# Altium PCB Pixel1.0_4.PcbDoc
Units mm, origin at the board's own origin, x right, y up, seen from the top; angles counter-clockwise.
Board outline 16.23 x 15.6 mm, 2 copper layers (Top, Bottom), stack 0.325 mm thick; 26 components, 11 nets, 59 pads, 6 vias.
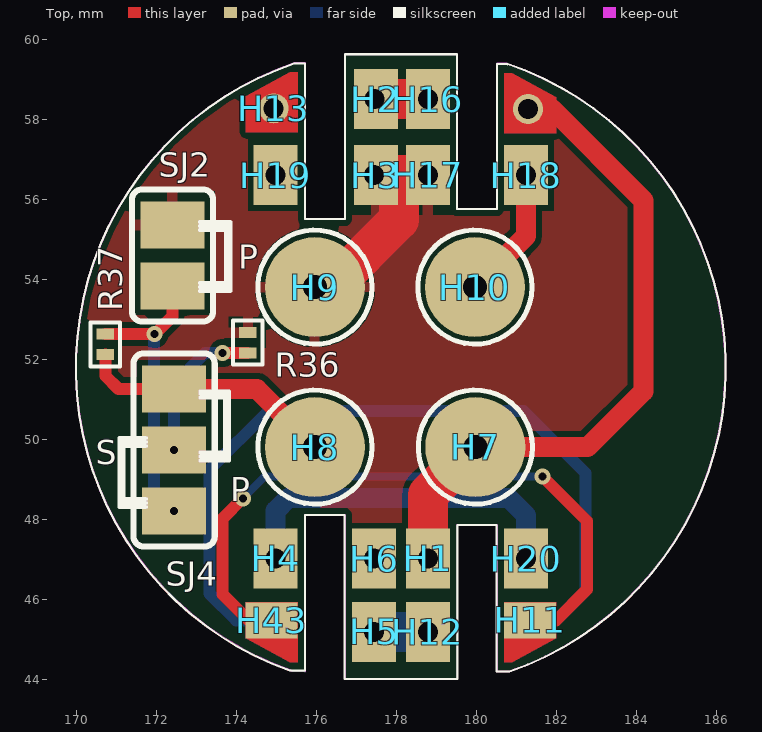
[diagram p0: Top view]
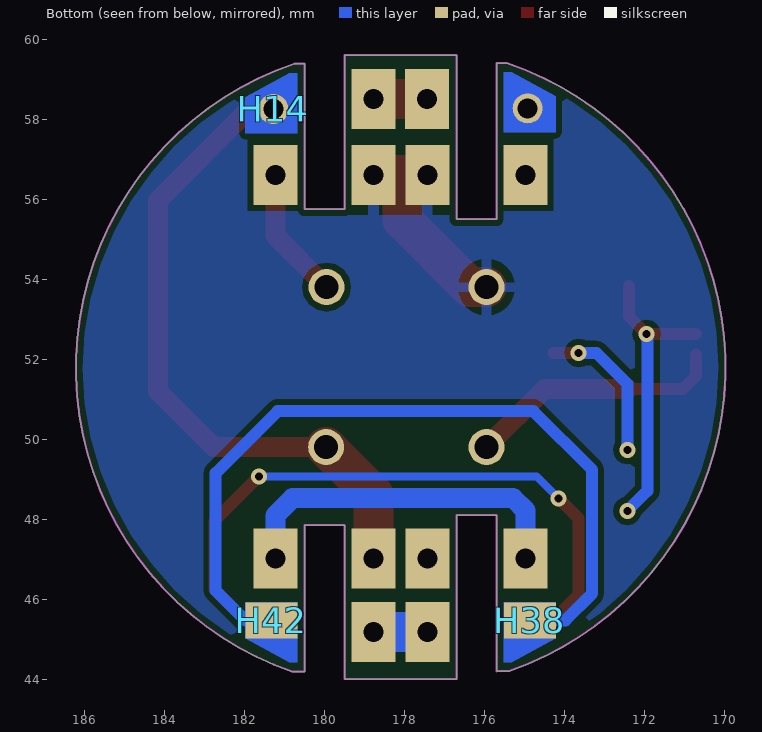
[diagram p1: Bottom view, seen from below]

## Layer stack, top to bottom
Top Solder: solder mask 0.0102, Solder Resist, Dk 3.5
Top: signal copper 0.0356
Dielectric 1: core 0.254, FR-4, Dk 4.2
Bottom: signal copper 0.0356
Bottom Solder: solder mask 0.0102, Solder Resist, Dk 3.5

## Board outline
175.376,44.2 175.7,44.2 175.7,48.1 176.7,48.1 176.7,44 179.5,44 179.5,47.85 180.5,47.85 180.5,44.186 180.814,44.186 180.807,44.186 ccw(c178.184,51.776) 180.756,59.383 180.751,59.386 180.5,59.386 180.5,55.75 179.5,55.75 179.5,59.6 176.7,59.6 176.7,55.5 175.7,55.5 175.7,59.4 175.439,59.4 175.434,59.397 ccw(c178.006,51.79)

## Design rules (kind name [scope] priority, off if disabled: settings)
Clearance [All] p1: gap=0.15
ComponentClearance [All] p1 off: gap=0.2 collisioncheckmode=3 verticalgap=0.2 showdistances=FALSE
HoleSize [All] p1: absolutevalues=TRUE maxlimit=5 minlimit=0.025 maxpercent=80.000 minpercent=20.000
HoleToHoleClearance mdViaViaSameLayer [All] p1: gap=0.203 allowstackedmicrovias=TRUE
HoleToHoleClearance [All] p2: gap=0.254 allowstackedmicrovias=TRUE
MinimumSolderMaskSliver [All] p1 off: minsoldermaskwidth=0.254
PolygonConnect ThermalVias [IsVia] p1: connectstyle=Direct reliefconductorwidth=0.254 reliefentries=4 polygonreliefangle="90 Angle" airgapwidth=0.254
PolygonConnect [All] p2: connectstyle=Relief reliefconductorwidth=0.254 reliefentries=4 polygonreliefangle="90 Angle" airgapwidth=0.254
RoutingVias [All] p1: holewidth=0.2 width=0.4 viastyle="Through Hole" minholewidth=0.2 minwidth=0.4 maxholewidth=3 maxwidth=5
ShortCircuit [All] p1 off: allowed=FALSE
SilkToBoardRegionClearance [All] p1 off:
SilkToSilkClearance [All] p1 off: silktosilkclearance=0.254
SilkToSolderMaskClearance [IsPad] p1 off: minsilkscreentomaskgap=0.254 clearancetoexposedcopper=TRUE
SolderMaskExpansion via [isvia] p1: expansion=0 soldermaskfromhole=TRUE
SolderMaskExpansion [All] p2: expansion=0.05
Width Width_2 [InNet('BAT+')] p1: maxlimit=3 minlimit=0.1 preferedwidth=0.3
Width Width_1 [InNet('GND')] p2: maxlimit=3 minlimit=0.1 preferedwidth=0.3
Width [All] p3: maxlimit=3 minlimit=0.1 preferedwidth=0.5
22 further rules are at their usual default settings.

## Components (designator, comment, footprint, x,y, rotation, side; value= is the part's Value field where it differs from the comment)
H1 "MOUNT-PAD-ROUNDTMOUNT2" TMOUNT2#1 178.774,47.01 r0 top
H2 "MOUNT-PAD-ROUNDTMOUNT2" TMOUNT2#2 177.44,58.5 r0 top
H3 "MOUNT-PAD-ROUNDTMOUNT2" TMOUNT2#3 177.43,56.6 r0 top
H4 "MOUNT-PAD-ROUNDTMOUNT2" TMOUNT2#1 174.97,47.01 r0 top
H5 "MOUNT-PAD-ROUNDTMOUNT2" TMOUNT2#1 177.43,45.18 r0 top
H6 "MOUNT-PAD-ROUNDTMOUNT2" TMOUNT2#1 177.43,47.01 r0 top
H7 "MOUNT-PAD-ROUND2.8" 2,0-PAD 179.96,49.8 r0 top
H8 "MOUNT-PAD-ROUND2.8" 2,0-PAD 175.95,49.8 r0 top
H9 "MOUNT-PAD-ROUND2.8" 2,0-PAD 175.95,53.8 r0 top
H10 "MOUNT-PAD-ROUND2.8" 2,0-PAD 179.95,53.8 r0 top
H11 "MOUNT-PAD-ROUNDTRAPEZOID" TMOUNT5 181.381,45.17 r0 top
H12 "MOUNT-PAD-ROUNDTMOUNT2" TMOUNT2#1 178.774,45.18 r0 top
H13 "MOUNT-PAD-ROUNDTMOUNT3" TMOUNT3 174.82,58.42 r180 top
H14 "MOUNT-PAD-ROUNDTMOUNT3" TMOUNT3 181.38,58.4 r0 bottom
H16 "MOUNT-PAD-ROUNDTMOUNT2" TMOUNT2#1 178.774,58.5 r0 top
H17 "MOUNT-PAD-ROUNDTMOUNT2" TMOUNT2#1 178.774,56.6 r0 top
H18 "MOUNT-PAD-ROUNDTMOUNT2" TMOUNT2#1 181.23,56.6 r0 top
H19 "MOUNT-PAD-ROUNDTMOUNT2" TMOUNT2#1 174.97,56.6 r0 top
H20 "MOUNT-PAD-ROUNDTMOUNT2" TMOUNT2#1 181.23,47.01 r0 top
H38 "MOUNT-PAD-ROUNDTRAPEZOID" TMOUNT5 174.816,45.17 r180 bottom
H42 "MOUNT-PAD-ROUNDMIRROR" TMOUNTTRAPMIRROR 181.28,45.17 r180 bottom
H43 "MOUNT-PAD-ROUNDMIRROR" TMOUNTTRAPMIRROR 174.92,45.17 r0 top
R36 "DNP" R0201 174.27,52.41 r270 top
R37 "DNP" R0201 170.71,52.37 r270 top
SJ2 "SJ" SJ 172.39,54.591 r270 top
SJ4 "SJ2W" SJ_2 172.431,49.729 r270 top

## Footprints (in the part's own frame and the unit in brackets; to place one, negate y for a bottom-side part, rotate by r counter-clockwise, add the part's x,y. Pads: shape width x height; smd on the part's side, far side on the other; paste and mask are expansions set on the pad)
2,0-PAD [mm] "2,0-PAD"
  rrect100% 2.5x2.5 smd: 1(0,0)
  round 0.9 hole 0.6: 1(0,0)
  silkscreen extent -1.42,-1.43 1.43,1.43
R0201 [mm] "R0201"
  rect 0.28x0.43 smd: 1(-0.255,0) 2(0.255,0)
  silkscreen extent -0.55,-0.37 0.55,0.37, body extent -0.32,-0.16 0.33,0.16, height 0.24
SJ [mil] "SJ"
  rect 46x63 smd: 1(-30,0) 2(30,0)
  silkscreen extent -65,-40 65,40
SJ_2 [mil] "SJ_2"
  rect 46x63 smd: 1(-60,0) 2(0,0) 3(60,0)
  silkscreen extent -95,-40 95,40
TMOUNT2#1 [mm] "TMOUNT2"
  rect 1.1x1.5 smd far side: 1(0,0)
  rect 1.1x1.5 smd: 1(0,0)
  round 0.75 hole 0.5: 1(0,0)
TMOUNT2#2 [mm] "TMOUNT2"
  rect 1.1x1.5 smd far side: 1(0,0)
  round 0.75 hole 0.5: 1(0,0)
  rect 1.1x1.5 smd: 1(0.04,0)
TMOUNT2#3 [mm] "TMOUNT2"
  rect 1.1x1.5 smd far side: 1(0,0)
  round 0.75 hole 0.5: 1(0,0)
  rect 1.1x1.5 smd: 1(0.05,0)
TMOUNT3 [mm] "TMOUNT3"
  round 0.75 hole 0.5: 1(-0.1,0.15)
  Top region: -0.7,0.75 -0.7,-0.75 -0.5,-0.75 0.6,-0.15 0.6,0.75
  Bottom region: -0.7,0.75 -0.7,-0.75 -0.5,-0.75 0.6,-0.15 0.6,0.75
TMOUNT5 [mm] "TMOUNT5"
  rect 1.3x0.9 smd: 1(-0.05,0.3)
  Top region: -0.7,0.75 -0.7,-0.75 -0.5,-0.75 0.6,-0.15 0.6,0.75
TMOUNTTRAPMIRROR [mm] "TMOUNTTRAPMIRROR"
  rect 1.3x0.9 smd: 1(-0.05,0.3)
  Top region: -0.7,0.75 -0.7,-0.15 0.4,-0.75 0.6,-0.75 0.6,0.75

## Part data
H1 H2 H3 H4 H5 H6 H7 H8 H9 H10 H11 H12 H13 H14 H16 H17 H18 H19 H20 H38 H42 H43: "MOUNTING PAD, round"
R36 R37: library part R-US_R0201, "RESISTOR, American symbol"
SJ2 SJ4: "SMD solder JUMPER"

## Via types
v1: diameter 0.4, hole 0.2, Top to Bottom, 6 vias

## Nets (pads, with @x,y where several pads share a name; then routed paths per layer and width w, separated by ;. In a path a pad name is that pad's centre, name@x,y a point inside that pad or via, vN(x,y) a via of type N, cw(c..) or ccw(c..) an arc to the next point about the centre after c; other vN are vias at no path point)
ATOMIZER+: H1.1 H7.1 H14.1 | length 16.7
  Top w0.5: H7.1@179.96,49.8 182.77,49.8 184.16,51.19 184.16,55.97 181.88,58.25 H14.1
  Top w1: H1.1@178.774,47.01 178.774,48.614 H7.1@179.96,49.8
BAT+: H2.1 H16.1 | length 1.3
  Top w1: H2.1@177.48,58.5 H16.1@178.774,58.5
CARTRIDGE_SENSE/SDA: H8.1 R37.2 SJ4.1 | length 6.5
  Top w0.3: R37.2 170.71,51.583 171.04,51.253 SJ4.1
  Top w0.5: SJ4.1 174.497,51.253 H8.1@175.95,49.8
GND: H3.1 H9.1 H17.1 R36.1 SJ2.1 | length 5.2
  Top w1: H9.1@175.95,53.8 176.37,53.8 178.05,55.48 178.05,56.6 ; H3.1@177.48,56.6 178.05,56.6 ; H17.1@178.774,56.6 178.05,56.6
NetR36_2: R36.2 SJ4.2 | length 3.8
  Top w0.3: v1(173.645,52.155) R36.2
  Bottom w0.3: v1(172.431,49.729) 172.431,51.38 173.206,52.155 v1(173.645,52.155)
NetR37_1: R37.1 SJ2.2 SJ4.3 | length 7.3
  Top w0.3: R37.1 v1(171.945,52.625) 172.39,53.07 SJ2.2
  Bottom w0.3: v1(171.945,52.625) 171.931,52.611 171.931,48.705 v1(172.431,48.205)
P2_2/DC/!CHARGE: H4.1 H20.1 | length 8.9
  Bottom w0.5: H4.1@174.97,47.01 174.97,48.21 175.285,48.525 180.795,48.525 181.23,48.09 H20.1@181.23,47.01
RXD: H11.1 H43.1 | length 17
  Top w0.3: v1(174.15,48.52) 173.645,48.015 173.645,46.115 174.29,45.47 H43.1 ; H11.1 181.98,45.47 182.75,46.24 182.75,47.958 v1(181.638,49.07)
  Top w0.5: H43.1 H43.1@174.87,45.64
  Bottom w0.2: v1(174.15,48.52) 174.7,49.07 v1(181.638,49.07)
SCL: H10.1 H18.1 | length 3.3
  Top w0.5: H10.1@179.95,53.8 181.23,55.08 H18.1@181.23,56.6
TXD: H38.1 H42.1 | length 20.2
  Bottom w0.3: H38.1@174.87,45.47 173.98,45.47 173.31,46.14 173.31,49.23 174.78,50.7 181.17,50.7 182.72,49.15 182.72,46.21 181.98,45.47 H42.1
VDD: H5.1 H12.1 | length 1.3
  Bottom w1: H5.1@177.43,45.18 H12.1@178.774,45.18
pads on no net: H6.1 H13.1 H19.1

## Polygon pours and split planes (outlines as drawn)
GND on Bottom "BOTTOM_GND" (solid, remove dead copper, pour order 0): 169.73,59.8 186.56,59.8 186.59,59.83 186.62,59.8 186.62,43.68 169.8,43.68 169.73,43.75 169.73,59.83
GND on Top "TOP_GND" (solid, remove dead copper, pour order 2): 169.8,60.05 169.84,60.09 186.33,60.09 186.33,43.43 169.77,43.43 169.77,60.01 169.73,60.05

## Keep-outs
Keep-Out Layer:
  lines w0.051: 175.376,44.2 175.7,44.2 ; 175.383,44.2 cw(c178.006,51.79) 175.434,59.397 ; 175.439,59.4 175.7,59.4 175.7,55.5 176.7,55.5 176.7,59.6 179.5,59.6 179.5,55.75 180.5,55.75 180.5,59.38 ; 175.7,44.196 175.7,48.1 176.7,48.1 176.7,44 179.5,44 179.5,47.85 180.5,47.85 180.5,44.186 180.814,44.186 ; 180.5,59.386 180.751,59.386 ; 180.756,59.383 cw(c178.184,51.776) 180.807,44.186

## Silkscreen, mask and mechanical layers (free items; w line width, h text height)
Top Overlay:
  lines w0.051: 175.32,44.21 175.7,44.21 175.7,48.098 176.69,48.098 176.69,44 179.51,44 179.51,47.85 180.49,47.85 180.49,44.186 ; 175.32,44.211 cw(c178.002,51.78) 175.43,59.387 ; 175.434,59.39 175.7,59.39 175.7,55.5 176.7,55.5 176.7,59.626 179.5,59.626 179.5,55.75 180.5,55.75 180.5,59.38 180.75,59.38 180.76,59.37 ; 180.496,44.186 180.812,44.186 ; 180.76,59.383 cw(c178.191,51.775) 180.817,44.187
  lines w0.102: 171.72,48.299 171.16,48.299 ; 171.72,48.399 171.16,48.399 ; 171.72,48.499 171.16,48.499 ; 171.72,49.826 171.16,49.826 ; 171.72,49.926 171.16,49.926 ; 171.72,50.026 171.16,50.026 ; 173.072,53.705 173.784,53.705 ; 173.072,53.805 173.834,53.805 ; 173.072,53.905 173.734,53.905 173.734,55.226 173.072,55.226 ; 173.072,55.326 173.834,55.326 ; 173.072,55.426 173.784,55.426 ; 173.092,49.467 173.802,49.467 173.802,49.567 ; 173.092,49.567 173.802,49.567 ; 173.092,49.667 173.702,49.667 ; 173.092,51.044 173.702,51.044 ; 173.092,51.144 173.802,51.144 ; 173.092,51.194 173.802,51.194 173.802,51.144 ; 171.16,48.299 171.06,48.299 171.06,50.026 171.16,50.026 ; 171.16,48.299 171.16,48.399 ; 171.16,48.399 171.16,48.499 ; 171.16,48.499 171.16,49.826 ; 171.16,49.826 171.16,49.926 ; 171.16,49.926 171.16,50.026 ; 173.702,49.667 173.802,49.667 ; 173.702,49.667 173.702,51.044 ; 173.702,51.044 173.802,51.044 ; 173.784,53.705 173.834,53.705 173.834,55.426 173.784,55.426 ; 173.784,53.705 173.784,55.426 ; 173.802,49.567 173.802,49.667 ; 173.802,49.667 173.802,51.044 ; 173.802,51.044 173.802,51.144
  text "P" at 174.037,54.261 h0.6
  text "S" at 170.47,49.37 h0.6
  text "P" at 173.83,48.45 h0.6
Bottom Overlay:
  text "Q14" at 235.942,31.549 h0.52 r45